# EAGLE board Yun_Shield.v2.4 (EAGLE 7.5.0)
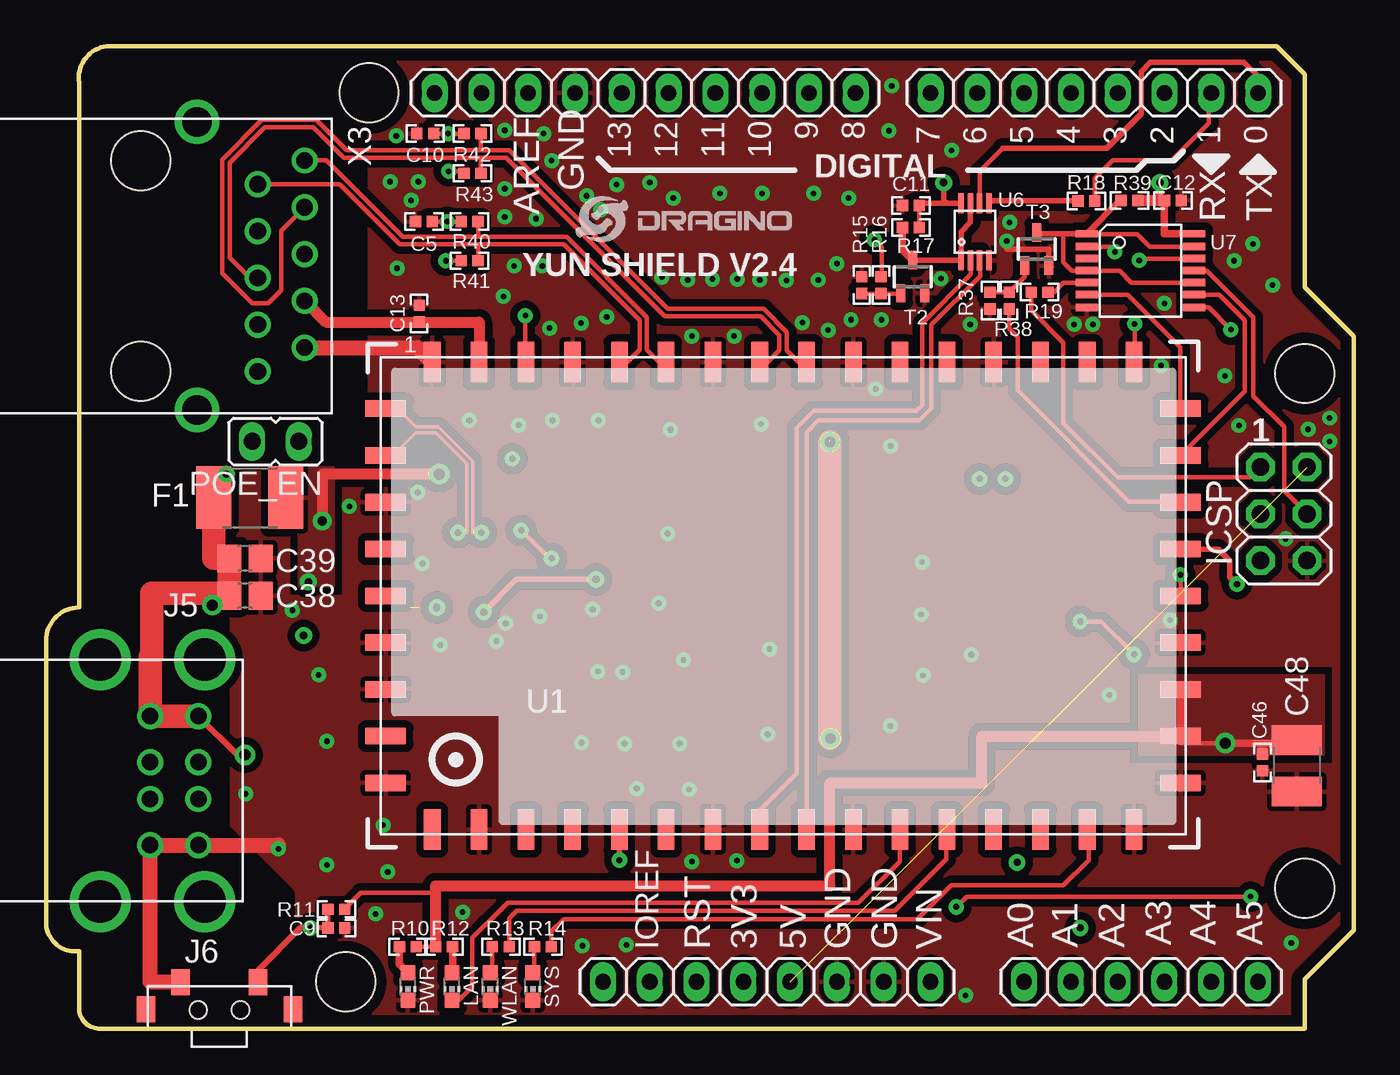
[diagram p0: board, top side]
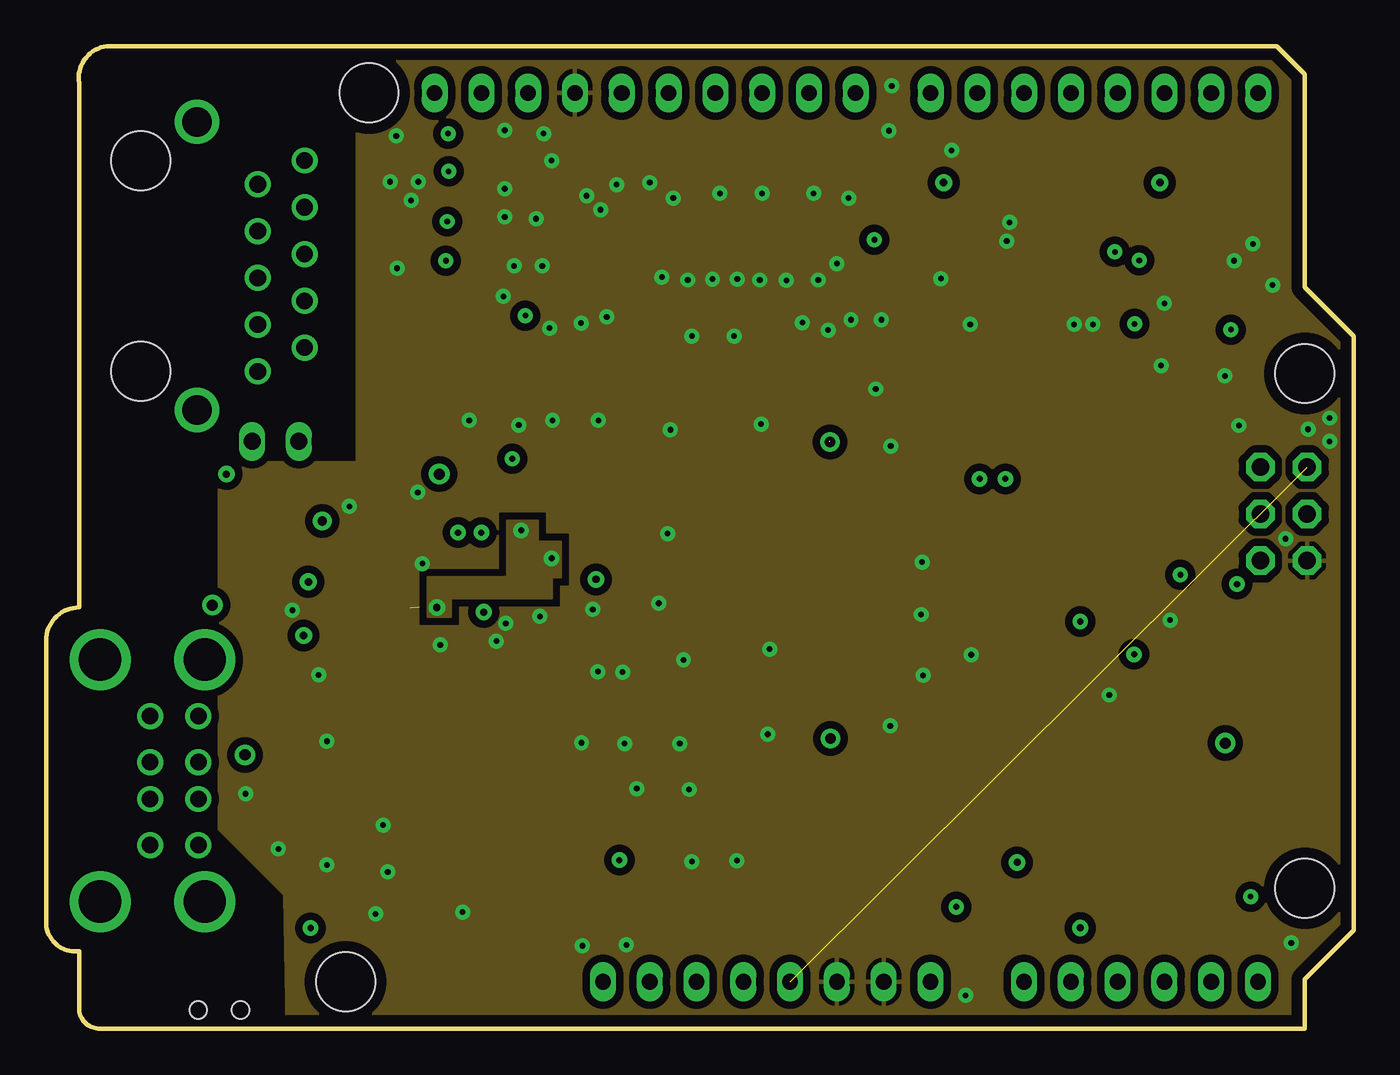
[diagram p1: board, inner layer GND]
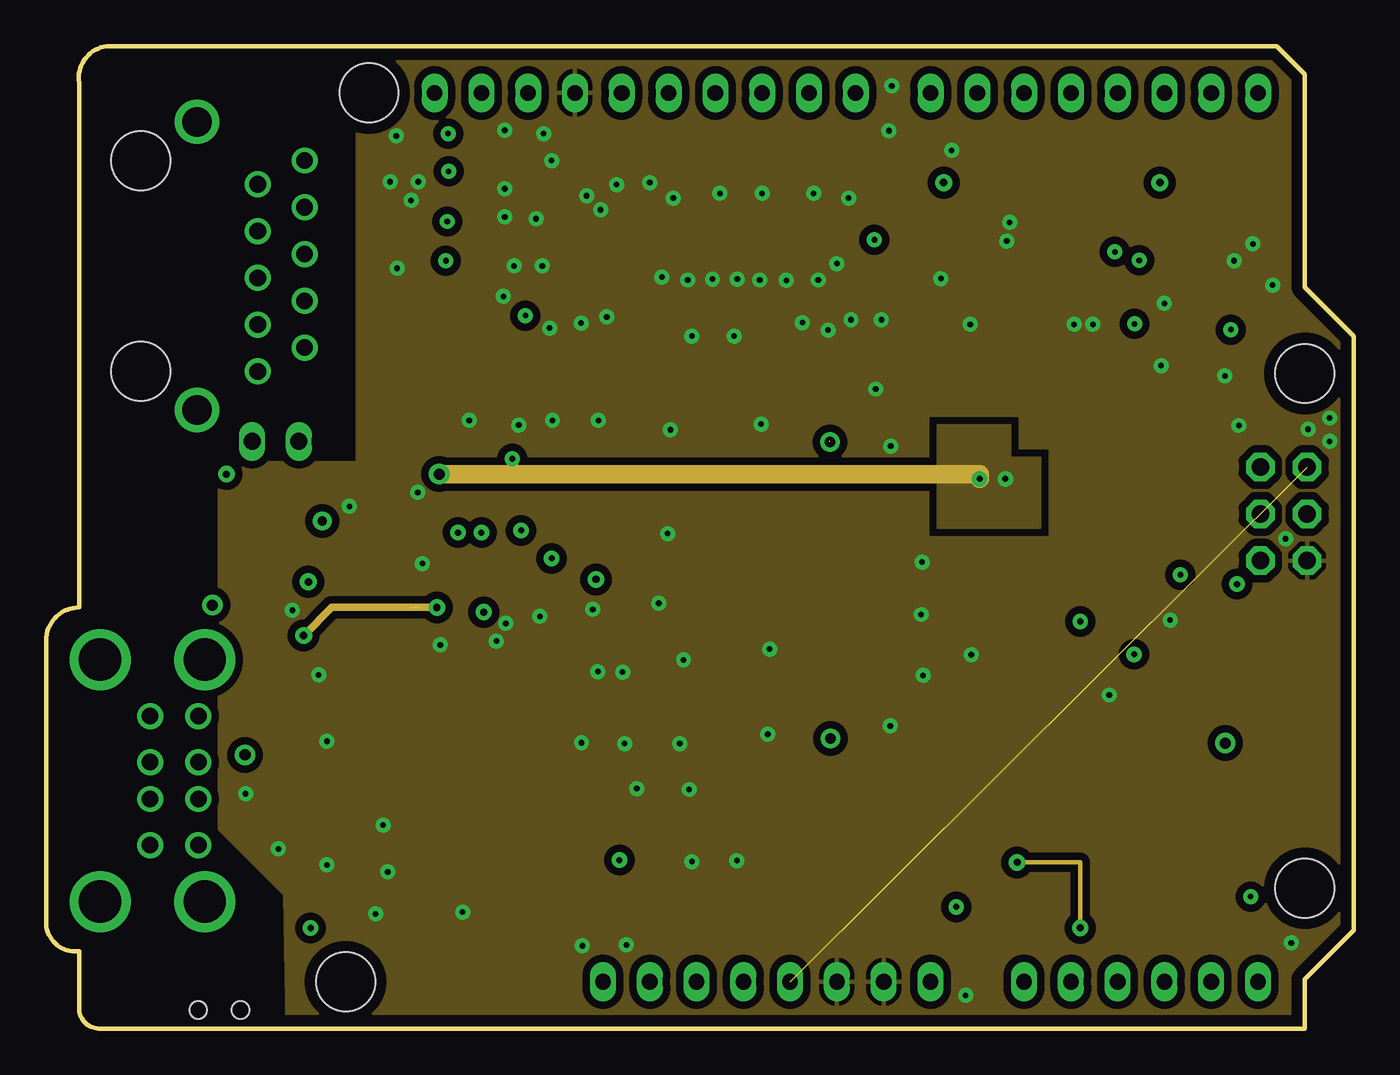
[diagram p2: board, inner layer VCC]
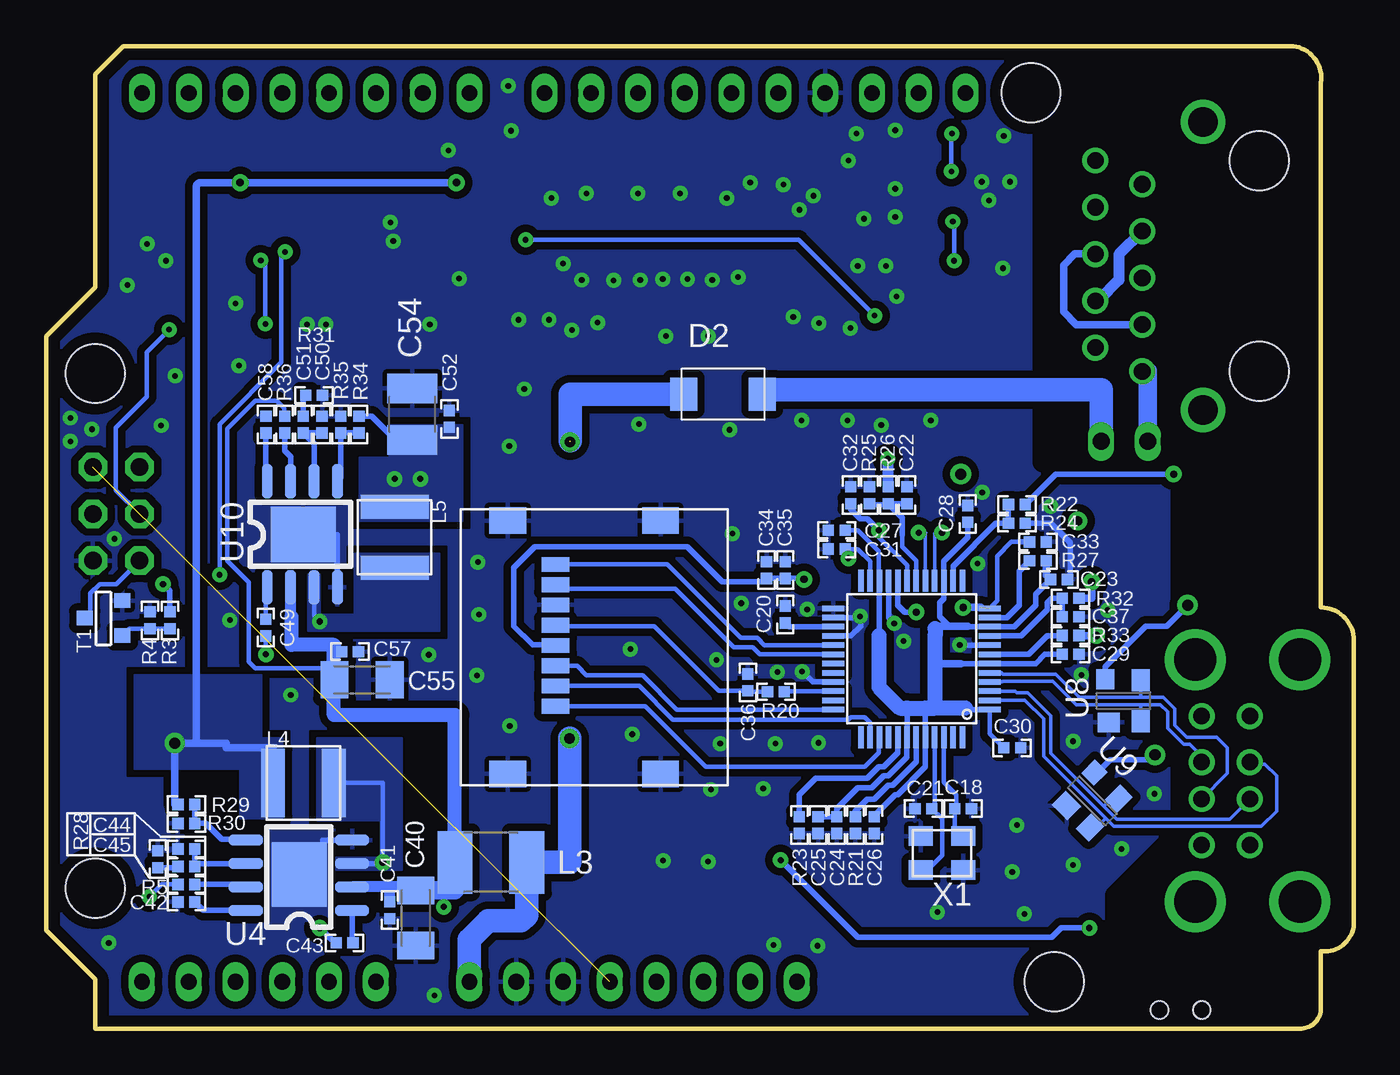
[diagram p3: board, bottom side, seen from below]

Size 71 x 53.35 mm. Coordinates in mm from the lower left corner, seen from the top.
Outline: 66.81,53.35 68.34,51.82 68.34,40.27 71,37.6 71,5.34 68.34,2.67 68.34,0.01 3.04,0.01 arc-90 1.79,1.02 1.79,4.2 1.41,4.2 arc-90 0.01,5.98 0.01,21.09 arc-90 1.79,22.87 1.79,51.35 arc-90 3.3,53.35 66.81,53.35
Copper layers (1*2+15*16): Top 0.035mm / dielectric 10mil / GND 0.017mm / dielectric 15mil / VCC 0.017mm / dielectric 10mil / Bottom 0.035mm
Design rules "default *": minimum track width 10mil, minimum drill 12mil, track to track 6mil, track to pad 8mil, pad to pad 8mil, via to via 12mil, smd to smd 8mil, copper to edge 24mil, drill to drill 12mil, minimum pad ring 10mil, minimum via ring 10mil, stop-mask expansion 2mil, vias tented up to drill 30mil, thermal gap 10mil
Net classes: 1 power: width 0.254 mm, drill 0.61 mm, clearance 0.254 mm; 2 gnd: width 0.305 mm, drill 0.33 mm, clearance 0.254 mm; 3 usbvcc: width 0.254 mm, drill 0.61 mm, clearance 0.254 mm; 4 aref: width 0.254 mm, drill 0.61 mm, clearance 0.254 mm; 5 usbtrace: width 0.254 mm, clearance 0.152 mm; 6 usbtrace-4layer: width 0.191 mm, clearance 0.203 mm
Holes 3.2 mm at 68.34,35.57 68.34,7.63 17.54,50.81 16.27,2.55
tRestrict: area 3.1,0.9 to 16.9,52.6
bRestrict: area 3.1,0.9 to 16.9,52.5
vRestrict: area 43.6,35.2 to 44.1,35.7

## Footprints (pad centres in the part's own frame; a part is rotated, then mirrored left to right if it is on the bottom)
C0402 = smd 0.61 x 0.61: 1 -0.457,0; 2 0.457,0
C0805 = smd 1.3 x 1.5: 1 -0.85,0; 2 0.85,0
C1206K = smd 1.5 x 2: 1 -1.5,0; 2 1.5,0
C1210 = smd 1.6 x 2.7: 1 -1.4,0; 2 1.4,0
DO214AC = smd 1.45 x 1.8: A 2.13,0; C -2.13,0
L1812 = smd 1.9 x 3.4: 1 -1.95,0; 2 1.95,0
2X03 = drill 0.95 pad 1.55 octagon: 1 -2.54,-1.27; 2 -2.54,1.27; 3 0,-1.27; 4 0,1.27; 5 2.54,-1.27; 6 2.54,1.27
1X08 = drill 0.85 pad 1.422 long: 1 -8.89,0; 2 -6.35,0; 3 -3.81,0; 4 -1.27,0; 5 1.27,0; 6 3.81,0; 7 6.35,0; 8 8.89,0
1X06 = drill 0.85 pad 1.422 long: 1 -6.35,0; 2 -3.81,0; 3 -1.27,0; 4 1.27,0; 5 3.81,0; 6 6.35,0
USB-DUAL-JS-AF10-002 = drill 0.9: 1 0,3.5; 2 0,1; 3 0,-1; 4 0,-3.5; 5 -2.62,3.5; 6 -2.62,1; 7 -2.62,-1; 8 -2.62,-3.5 | drill 2.3: 9 0.35,6.57; 10 0.35,-6.57; 11 -5.33,6.57; 12 -5.33,-6.57
TS-017 = smd 1 x 1.4: P$1 -2.1,-1.5; P$2 2.1,-1.5; P$3 -3.994,-0.034; P$4 3.994,-0.034 | hole 0.95: -1.15,0; 1.15,0
1X10 = drill 0.85 pad 1.422 long: 1 -11.43,0; 2 -8.89,0; 3 -6.35,0; 4 -3.81,0; 5 -1.27,0; 6 1.27,0; 7 3.81,0; 8 6.35,0; 9 8.89,0; 10 11.43,0
SWPA4020S = smd 3.7 x 1.3: P$1 0,1.65; P$2 0,-1.65
CHIP-LED0603 = smd 0.8 x 0.8: A 0,-0.75; C 0,0.75
JP1 = drill 0.914 long: 1 0,-1.27; 2 0,1.27
R0402 = smd 0.61 x 0.61: 1 -0.457,0; 2 0.457,0
SOT-23 = smd 0.787 x 0.889: 1 0,-1.016; 2 -0.95,1.016; 3 0.95,1.016
SOT323 = smd 0.5 x 1: 1 0,0.9; 2 -0.65,-0.9; 3 0.65,-0.9
HE50 = smd 0.9 x 2.198: 1 -19.05,12.69; 2 -16.51,12.69; 3 -13.97,12.69; 4 -11.43,12.69; 5 -8.89,12.69; 6 -6.35,12.69; 7 -3.81,12.69; 8 -1.27,12.69; 9 1.27,12.69; 10 3.81,12.69; 11 6.35,12.69; 12 8.89,12.69; 13 11.43,12.69; 14 13.97,12.69; 15 16.51,12.69; 16 19.05,12.69; 26 19.05,-12.69; 27 16.51,-12.69; 28 13.97,-12.69; 29 11.43,-12.69; 30 8.89,-12.69; 31 6.35,-12.69; 32 3.81,-12.69; 33 1.27,-12.69; 34 -1.27,-12.69; 35 -3.81,-12.69; 36 -6.35,-12.69; 37 -8.89,-12.69; 38 -11.43,-12.69; 39 -13.97,-12.69; 40 -16.51,-12.69; 41 -19.05,-12.69 | smd 2.198 x 0.9: 17 21.579,10.16; 18 21.579,7.62; 19 21.579,5.08; 20 21.579,2.54; 21 21.579,0; 22 21.579,-2.54; 23 21.579,-5.08; 24 21.579,-7.62; 25 21.579,-10.16; 42 -21.579,-10.16; 43 -21.579,-7.62; 44 -21.579,-5.08; 45 -21.579,-2.54; 46 -21.579,0; 47 -21.579,2.54; 48 -21.579,5.08; 49 -21.579,7.62; 50 -21.579,10.16
AU6350_LQFP-48 = smd 1.2 x 0.3: 1 -4.25,2.75; 2 -4.25,2.25; 3 -4.25,1.75; 4 -4.25,1.25; 5 -4.25,0.75; 6 -4.25,0.25; 7 -4.25,-0.25; 8 -4.25,-0.75; 9 -4.25,-1.25; 10 -4.25,-1.75; 11 -4.25,-2.25; 12 -4.25,-2.75; 25 4.25,-2.75; 26 4.25,-2.25; 27 4.25,-1.75; 28 4.25,-1.25; 29 4.25,-0.75; 30 4.25,-0.25; 31 4.25,0.25; 32 4.25,0.75; 33 4.25,1.25; 34 4.25,1.75; 35 4.25,2.25; 36 4.25,2.75 | smd 0.3 x 1.2: 13 -2.75,-4.25; 14 -2.25,-4.25; 15 -1.75,-4.25; 16 -1.25,-4.25; 17 -0.75,-4.25; 18 -0.25,-4.25; 19 0.25,-4.25; 20 0.75,-4.25; 21 1.25,-4.25; 22 1.75,-4.25; 23 2.25,-4.25; 24 2.75,-4.25; 37 2.75,4.25; 38 2.25,4.25; 39 1.75,4.25; 40 1.25,4.25; 41 0.75,4.25; 42 0.25,4.25; 43 -0.25,4.25; 44 -0.75,4.25; 45 -1.25,4.25; 46 -1.75,4.25; 47 -2.25,4.25; 48 -2.75,4.25
RT8250-SOP8 = smd 1.88 x 0.61: 1 -1.219,0; 2 -1.219,-1.27; 3 -1.219,-2.54; 4 -1.219,-3.81; 5 4.547,-3.81; 6 4.547,-2.54; 7 4.547,-1.27; 8 4.547,0 | smd 2.997 x 3.505: 9 1.651,-1.956
US8 = smd 0.3 x 1.1: 1 -0.75,-1.55; 2 -0.25,-1.55; 3 0.25,-1.55; 4 0.75,-1.55; 5 0.75,1.55; 6 0.25,1.55; 7 -0.25,1.55; 8 -0.75,1.55
74VHC125 = smd 0.4 x 1.2: 1 -2.13,-2.88; 2 -1.43,-2.88; 3 -0.78,-2.88; 4 -0.13,-2.88; 5 0.52,-2.88; 6 1.17,-2.88; 7 1.87,-2.88; 8 1.87,2.97; 9 1.17,2.97; 10 0.52,2.97; 11 -0.13,2.97; 12 -0.78,2.97; 13 -1.43,2.97; 14 -2.13,2.97
SOT143 = smd 1.194 x 1.067: 1 -0.72,-1.207 | smd 0.991 x 1.194: 2 1.007,-1.143; 3 1.007,1.067 | smd 0.991 x 1.067: 4 -0.923,1.13
RIONET_472192001_SD = smd 0.8 x 1.5: 1 3.2,-1.55; 2 2.1,-1.55; 3 1,-1.55; 4 -0.1,-1.55; 5 -1.2,-1.55; 6 -2.3,-1.55; 7 -3.4,-1.55; 8 -4.5,-1.55 | smd 1.45 x 2: G1 6.875,-4.15; G2 6.875,4.15; G3 -6.875,4.15; G4 -6.875,-4.15
SMARTPRJ_CRYSTAL-3.2-2.5 = smd 1.3 x 1.05: 1 -1.15,-0.925; 2 1.15,-0.925; 3 1.15,0.925; 4 -1.15,0.925
MJ1A-B211-RT009 = drill 0.9: 1 -5.725,9.07; 2 -4.435,6.53; 3 -3.185,9.07; 4 -1.895,6.53; 5 -0.645,9.07; 6 0.645,6.53; 7 1.895,9.07; 8 3.185,6.53; 9 4.435,9.07; 10 5.725,6.53 | drill 1.6: M1 -7.825,3.23; M2 7.825,3.23 | hole 3.2: -5.715,0.18; 5.715,0.18

## Placement (x,y rotation side)
C5  0.1u 10v  [C0402]  20.51,43.82 180 top
C9  0.1u NL  [C0402]  15.76,5.47 0 top
C10  0.1u 10v  [C0402]  20.58,48.6 180 top
C11  0.1uF  [C0402]  46.95,44.68 0 top
C12  0.1uF  [C0402]  61.17,44.96 180 top
C13  0.1u 10v  [C0402]  20.25,38.82 90 top
C18  18pF  [C0402]  21.22,11.94 0 bottom
C20  1uF  [C0402]  30.87,22.49 90 bottom
C21  18pF  [C0402]  23.38,11.94 180 bottom
C22  1uF  [C0402]  24.27,28.96 90 bottom
C23  4.7uF  [C0402]  16.01,24.39 0 bottom
C24  4.7uF  [C0402]  28.08,11.06 270 bottom
C25  1uF  [C0402]  29.09,11.06 270 bottom
C26  4.7uF  [C0402]  26.05,11.06 270 bottom
C27  0.1uF  [C0402]  28.08,27.06 180 bottom
C28  0.1uF  [C0402]  20.97,27.95 90 bottom
C29  0.1uF  [C0402]  15.38,20.33 0 bottom
C30  0.1uF  [C0402]  18.55,15.25 0 bottom
C31  4.7uF  [C0402]  28.08,26.04 180 bottom
C32  4.7uF  [C0402]  27.32,28.96 90 bottom
C33  0.1uF  [C0402]  17.16,26.42 0 bottom
C34  0.1uF  [C0402]  31.89,24.9 90 bottom
C35  1uF  [C0402]  30.87,24.9 90 bottom
C36  10pf,NL  [C0402]  32.9,18.8 90 bottom
C37  2.2uF  [C0402]  15.38,22.36 0 bottom
C38  10uF  [C0805]  10.81,23.5 180 top
C39  10uF  [C0805]  10.81,25.53 180 top
C40  10u,25v  [C1206K]  50.94,6.01 270 bottom
C41  NL  [C0402]  52.34,6.43 270 bottom
C42  0.1u,10v  [C0402]  63.38,6.88 180 bottom
C43  0.01u,16v  [C0402]  54.8,4.66 180 bottom
C44  NL  [C0402]  63.38,9.76 0 bottom
C45  3900pf,25v  [C0402]  63.38,8.8 0 bottom
C46  NL  [C0402]  66.03,14.46 90 top
C48  22u,10v  [C1210]  67.9,14.27 270 top
C49  0.01u,16v  [C0402]  59.07,21.77 270 bottom
C50  NL  [C0402]  56.02,32.8 270 bottom
C51  3900pf,25v  [C0402]  57.03,32.8 270 bottom
C52  NL  [C0402]  49.11,33.1 270 bottom
C54  22u,10v  [C1210]  51.12,33.37 90 bottom
C55  10uf,25v  [C1206K]  53.84,18.94 0 bottom
C57  NL  [C0402]  54.5,20.47 0 bottom
C58  0.1u,10v  [C0402]  59.07,32.8 90 bottom
D2  STPS1L30  [DO214AC]  34.25,34.45 0 bottom
F1  Fuse , 1A  [L1812]  11.06,28.84 0 top
ICSP  ICSP  [2X03]  67.19,27.95 270 top
J2  8x1F-H8.5  [1X08]  56.91,50.81 180 top
J3  8x1F-H8.5  [1X08]  39.13,2.55 0 top
J4  6x1F-H8.5  [1X06]  59.45,2.55 0 top
J5  USB-CON-A-DUAL  [USB-DUAL-JS-AF10-002]  8.27,13.47 0 top
J6  SWITCHTS-017  [TS-017]  9.41,1.02 180 top
JP1  10x1F-H8.5  [1X10]  32.52,50.81 180 top
L3  1A  [L1812]  46.85,9.03 180 bottom
L4  10uH /SWPA4020S100MT  [SWPA4020S]  57.03,13.34 270 bottom
L5  15uH / SWPA4030S150MT  [SWPA4020S]  52.08,26.68 180 bottom
LAN  Yellow  [CHIP-LED0603]  22.03,2.29 180 top
POE_EN  [JP1]  12.46,31.88 90 top
PWR  Yellow-Green  [CHIP-LED0603]  19.65,2.29 180 top
R3  10k  [R0402]  64.28,22.17 90 bottom
R4  10k  [R0402]  65.36,22.17 90 bottom
R5  100K  [R0402]  63.38,7.83 180 bottom
R10  330R  [R0402]  19.64,4.45 180 top
R11  10K  [R0402]  15.76,6.48 0 top
R12  330R  [R0402]  21.61,4.45 0 top
R13  270R  [R0402]  24.69,4.45 180 top
R14  270R  [R0402]  26.97,4.45 180 top
R15  47K  [R0402]  44.28,40.37 270 top
R16  47K  [R0402]  45.32,40.37 270 top
R17  100K  [R0402]  46.95,43.49 180 top
R18  3.3K  [R0402]  56.48,44.94 0 top
R19  3.3K  [R0402]  53.94,39.99 180 top
R20  0R  [R0402]  31.38,18.29 180 bottom
R21  680  [R0402]  27.06,11.06 90 bottom
R22  5.1K  [R0402]  18.3,28.45 0 bottom
R23  330  [R0402]  30.11,11.06 270 bottom
R24  10K  [R0402]  18.3,27.44 180 bottom
R25  470K  [R0402]  26.3,28.96 90 bottom
R26  47K  [R0402]  25.28,28.96 90 bottom
R27  0R  [R0402]  17.16,25.41 180 bottom
R28  6.81K  [R0402]  64.94,9.2 270 bottom
R29  26.1K  [R0402]  63.38,12.17 180 bottom
R30  10K  [R0402]  63.38,11.14 0 bottom
R31  13K  [R0402]  56.45,34.39 180 bottom
R32  0R  [R0402]  15.38,23.37 180 bottom
R33  0R  [R0402]  15.38,21.34 180 bottom
R34  45.3K  [R0402]  54.02,32.8 90 bottom
R35  10K  [R0402]  55.01,32.8 270 bottom
R36  100K  [R0402]  58.05,32.8 90 bottom
R37  47K  [R0402]  51.24,39.53 90 top
R38  47K  [R0402]  52.28,39.53 90 top
R39  100K  [R0402]  58.81,44.96 180 top
R40  49.9R  [R0402]  23,43.82 0 top
R41  49.9R  [R0402]  23,41.69 0 top
R42  49.9R  [R0402]  23.15,48.6 0 top
R43  49.9R  [R0402]  23.15,46.44 0 top
SYS  WHITE  [CHIP-LED0603]  26.43,2.29 180 top
T1  BSS138/SOT23  [SOT-23]  67.88,22.29 270 bottom
T2  2SC4081/SC70  [SOT323]  47.05,40.82 0 top
T3  2SC4081/SC70  [SOT323]  53.78,42.32 0 top
U1  HE  [HE50]  40.02,23.5 0 top
U3  AU6353  [AU6350_LQFP-48]  24.01,20.07 180 bottom
U4  RT8250  [RT8250-SOP8]  55.61,6.43 180 bottom
U6  NC7WZ125  [US8]  50.43,43.26 0 top
U7  74VHC125  [74VHC125]  59.37,41.03 270 top
U8  YSSR05  [SOT143]  12.58,17.84 0 bottom
U9  YSSR05  [SOT143]  14.23,12.45 315 bottom
U10  RT8250  [RT8250-SOP8]  59,25.18 90 bottom
U$1  LOGO-NEW  [LOGO-SILK-NEW]  28.76,42.73 0 top
U$14  [RIONET_472192001_SD]  41.79,20.71 270 bottom
WLAN  BLUE  [CHIP-LED0603]  24.12,2.29 180 top
X1  12Mhz  [SMARTPRJ_CRYSTAL-3.2-2.5]  22.36,9.53 180 bottom
X3  RJ45-MJ1A-B211-RT009  [MJ1A-B211-RT009]  4.96,41.41 270 top

## Library data of the parts
C5 C9-C13 C18 C20-C46 C48-C52 C54 C55 C57 C58 D2 F1 J5 J6 L3-L5 LAN POE_EN PWR R3-R5 R10-R43 SYS U1 U3 U4 U6-U10 U$1 U$14 WLAN = dragino
ICSP J2-J4 JP1 = SmartPrj
T1 = dragino; OC_FARNELL: unknown; OC_NEWARK: unknown
T2 T3 = zetex; MPN: DSS4160U-7; OC_FARNELL: 1710696; OC_NEWARK: 25R4558
X1 = rionita7
X3 = dragino-passive

## Nets
2.5V: U1.36
+3V3: C11.2 C12.2 C46.2 C48.1 L4.P$2 R10.1 R11.2 R12.1 R17.1 R29.2 R39.1 U1.23 U1.24 U6.8 U7.14
+5V [usbvcc]: ICSP.2 J3.5
+5V_USB [usbvcc]: C52.2 C54.1 F1.2 L5.P$2 R26.2 R32.1 R34.2
/RESET: ICSP.5 T1.1
/SPI_OE: R39.2 T3.1 U7.1 U7.4 U7.10 U7.13
/UART_OE: R17.2 T2.1 U6.1 U6.7
CHIP_RESETN: C22.1 R25.1 R26.1 U3.18
CPWR_V33: C34.1 C35.1 U3.20 U$14.4
CTRL_2.0V: C13.1 U1.2 X3.4 X3.7
DP1_OVRCUR: R22.1 R24.2 U3.14
DP1_PWRUP: U3.13
GND [gnd]: C5.2 C9.2 C10.2 C11.1 C12.1 C13.2 C18.2 C20.2 C21.2 C22.2 C23.2 C24.2 C25.2 C26.2 C27.2 C28.2 C29.2 C30.2 C31.2 C32.2 C33.2 C34.2 C35.2 C36.2 C37.2 C38.1 C39.1 C40.2 C41.2 C42.2 C44.1 C46.1 C48.2 C50.1 C52.1 C54.2 C55.2 C57.2 C58.2 ICSP.6 J3.6 J3.7 J5.4 J5.8 J6.P$2 JP1.7 PWR.C R4.2 R15.1 R21.1 R23.2 R24.1 R25.2 R28.1 R30.1 R31.1 R35.1 R37.1 SYS.C T1.2 T2.3 T3.3 U1.1 U1.4 U1.7 U1.10 U1.13 U1.22 U1.25 U1.26 U1.32 U1.35 U1.40 U1.42 U1.44 U1.45 U1.48 U3.8 U3.21 U3.25 U3.26 U3.28 U3.33 U4.4 U4.9 U6.4 U7.7 U8.1 U9.1 U10.4 U10.9 U$14.6 U$14.G1 U$14.G2 U$14.G3 U$14.G4 WLAN.C X1.2 X1.4 X3.9
GPIO18: U1.18 U7.9
GPIO19: R38.1 U1.19
GPIO20: R3.2 U1.20
GPIO21: U1.16 U7.12
GPIO22: U1.17 U7.6
GPIO23: U1.21 U7.2
GPIO24: R16.1 U1.3
GPIO28: R14.1 U1.27
JUMPSTART: C9.1 J6.P$1 R11.1 U1.37
LED_P0: LAN.C U1.31
LED_WLAN: R13.1 U1.30
MISO: ICSP.1 R19.2
MOSI: ICSP.4 U7.11
N$1: R3.1 R4.1 T1.3
N$2: R15.2 R16.2 T2.2
N$4: PWR.A R10.2
N$6: LAN.A R12.2
N$8: R13.2 WLAN.A
N$9: R14.2 SYS.A
N$10: R18.1 U6.5
N$11: R5.1 U4.7
N$12: R23.1 U3.41
N$13: R37.2 R38.2 T3.2
N$14: R19.1 U7.5
N$15: X3.5 X3.8
N$16: R21.2 U3.43
N$17: C5.1 R40.1 R41.1
N$18: C10.1 R42.1 R43.1
N$19: C42.1 U4.8
N$20: POE_EN.2 X3.10
N$22: C36.1 R20.2 U$14.5
N$23: C20.1 U3.27
N$24: R27.2 U3.11
N$25: C43.1 U4.1
N$26: C43.2 L4.P$1 U4.3
N$27: C44.2 C45.2 U4.6
N$28: C45.1 R28.2
N$29: C37.1 R32.2 U3.9
N$30: R33.2 U3.7
N$31: R29.1 R30.2 U4.5
N$32: C49.1 U10.1
N$33: C49.2 L5.P$1 U10.3
N$34: C50.2 C51.2 U10.6
N$35: C51.1 R31.2
N$36: R34.1 R35.2 U10.5
N$37: R36.1 U10.7
N$38: C58.1 U10.8
N$101: C40.1 C41.1 C55.1 C57.1 L3.2 R5.2 R36.2 U4.2 U10.2
OPTIONAL_ANT: U1.41
P0_RX_N: R43.2 U1.8 X3.6
P0_RX_P: R42.2 U1.9 X3.3
P0_TX_N: R41.2 U1.5 X3.2
P0_TX_P: R40.2 U1.6 X3.1
P1_P2_PWR: C38.2 C39.2 F1.1 J5.1 J5.5 R22.2 U8.4 U9.4
POE_VIN: D2.A POE_EN.1
RX: J2.2 R18.2
SCK: ICSP.3 U7.8
SD_CLK: R20.1 U3.34
SD_CMD: U3.36 U$14.3
SD_DAT0: U3.30 U$14.7
SD_DAT1: U3.29 U$14.8
SD_DAT2: U3.39 U$14.1
SD_DAT3: U3.38 U$14.2
SS: U7.3
TX: J2.1 U6.6
UART_RX: U1.33 U6.3
UART_TX: U1.34 U6.2
USB3_D_N [usbtrace-4layer]: J5.6 U3.2 U9.2
USB3_D_P [usbtrace-4layer]: J5.7 U3.3 U9.3
USB4_D_N [usbtrace-4layer]: J5.2 U3.4 U8.2
USB4_D_P [usbtrace-4layer]: J5.3 U3.5 U8.3
USB_N [usbtrace]: U1.50 U3.17
USB_P [usbtrace]: U1.49 U3.16
VCC1.8: C31.1 C32.1 C33.1 R33.1 U3.12 U3.19 U3.23
VCC3.3: C23.1 C24.1 C25.1 C26.1 C27.1 C28.1 C29.1 C30.1 R27.1 U3.1 U3.6 U3.10 U3.15 U3.22 U3.42 U3.44
VIN: D2.C J3.8 L3.1
XSCI: C18.1 U3.46 X1.1
XSCO: C21.1 U3.45 X1.3

## Tracks (layer width: path | path; a pad name or v marks a point on that pad's centre or on a via)
+3V3  (via drill 0.41, 0.6)
  Top 0.254: R12.1 R10.1 | C11.2 R17.1 | U1.24 61.59,15.5 v64.02,15.5 | R11.2 16.22,6.51 17.08,7.37 21.1,7.37 21.15,7.42
  Top 0.305: C11.2 47.46,44.74 arc-45 47.64,44.81 U6.8 48.98,44.81 arc-90 48.73,45.07 v48.73,45.93
  Top 0.406: C46.2 66.03,15.5 | 66.03,15.5 v64.02,15.5 | C48.1 67.9,15.5 66.03,15.5 | U1.23 U1.24 | v60.46,45.93 60.46,45.22 arc90 C12.2 60.72,43.16 U7.14
  Top 0.61: R39.1 C12.2 | R12.1 21.15,7.42 21.15,7.75 42.56,7.75 42.56,13.34 50.81,13.34 50.81,15.88 U1.24
  Bottom 0.406: R29.2 64.02,12.17 v64.02,15.5 62.85,15.5 | L4.P$2 58.68,15.25 61.22,15.25 61.22,15.5 62.85,15.5 | v48.73,45.93 v60.46,45.93 62.6,45.93 arc-90 62.85,45.68 62.85,15.5
  pour Bottom (no thermals): 58.18,15.75 58.18,11.44 60.46,11.44 60.46,14.1 66.18,14.1 66.18,19.18 59.32,19.18 59.32,15.75
  pour Top (no thermals): 59.32,19.18 69.35,19.18 69.35,14.87 59.32,14.87
+5V  (1 unrouted)
+5V_USB  (via drill 0.3, 0.33, 0.41, 0.51, 0.61)
  Top 0.61: v21.35,30.11 15,30.11 v15,27.57
  VCC 0.61: v25.31,30.94 25.31,30.41 25,30.11
  VCC 1.016: v21.35,30.11 25,30.11 50.68,30.11 v50.68,29.85
  Bottom 0.305: R34.2 53.33,33.26 52.08,32.01 51.17,32.01 C54.1
  Bottom 0.406: R32.1 14.23,23.37 v14.23,24.26
  Bottom 0.61: R26.2 25.28,30.92 v25.31,30.94
  other vias: 52.08,29.85
  pour Bottom (no thermals): 48.4,32.77 48.4,27.57 53.99,27.57 53.99,30.99 52.33,30.99 52.33,32.77
  pour VCC (no thermals): 48.4,31.76 48.4,27.18 53.99,27.18 53.99,30.99 52.33,30.99 52.33,32.77 48.4,32.77
  pour Top: 13.85,30.49 15.63,30.49 15.63,24.01 13.73,24.01 13.73,30.49
/RESET
  Bottom 0.254: T1.1 68.59,22.6 68.59,23.63 68.08,24.14 67.19,24.14 ICSP.5
/SPI_OE
  Top 0.254: 56.01,43.14 55.99,43.16 | U7.10 58.93,40.51 58.28,41.15 U7.4 | U7.4 | U7.4 55.69,41.15 55.23,41.61 55.23,43.16 | U7.13 59.92,42.46 59.24,43.14 56.51,43.14 U7.1
  Top 0.305: R39.2 58.3,44.96 U7.1 55.99,43.16 55.23,43.16 53.85,43.16 T3.1
/UART_OE
  Top 0.305: T2.1 U6.1 49.68,43.27 50.18,43.77 U6.7
  Top 0.406: R17.2 46.49,42.28 T2.1
CHIP_RESETN
  Bottom 0.254: 24.52,26.8 24.52,26.17 23.76,25.41 U3.18
  Bottom 0.305: 24.52,26.8 24.52,27.74 R26.1 | R26.1 25.28,28.45 26.25,28.45 R25.1 | R26.1 C22.1
CPWR_V33  (via drill 0.38)
  Top 0.305: v23.76,22.61 25.54,24.39 v29.86,24.39
  Bottom 0.305: U3.20 24.78,24.31 24.78,22.99 24.39,22.61 v23.76,22.61 | U$14.4 43.37,20.83 44.59,20.83 45.6,21.85 45.6,25.03 44.46,26.17 36.21,26.17 34.3,24.26 32.07,24.26 C34.1 C35.1 29.91,24.44 v29.86,24.39
CTRL_2.0V
  Top 0.305: 23.51,36.05 U1.2
  Top 0.61: X3.7 15.19,38.36 C13.1 23.51,38.36 U1.2
  Bottom 0.61: X3.4 12.76,42.04 12.76,40.65 13.89,39.51 X3.7
DP1_OVRCUR
  Bottom 0.305: U3.14 21.76,25.12 19.44,27.44 R24.2 R22.1
GND  (via drill 0.3)
  Top 0.305: T3.3 54.43,42.32 52.16,42.32 v52.16,42.75
  Top 0.813: X3.9 20.18,36.97 U1.1 | J6.P$2 5.65,2.52 J5.8 J5.4 12.61,9.97 v12.61,9.76
  Bottom 0.305: U4.9 57.26,9.96 55.99,9.96 55.99,10.24 U4.4 | U10.9 55.19,26.83 U10.4 | R24.1 16.47,27.44 15.4,26.37 15.4,24.54 C23.2 | U3.21 25.26,22.31 v24.95,22 | U3.26 26.87,22.32 v26.81,22.38 26.78,22.36 26.78,21.85 27.31,21.32 U3.28 | U3.33 29.39,18.82 v29.96,19.39 | U3.8 21.4,20.82 v21.4,20.83
  other vias: 15.25,8.9 18.3,11.06 18.55,8.52 37.35,37.6 35.06,37.6 41.06,38.33 30.97,45.83 40.19,40.62 38.75,40.65 37.53,40.7 36.18,40.7 34.83,40.65 33.44,40.8 24.83,39.76 29.04,38.31 27.34,38.03 30.44,38.64 26.93,41.41 25.41,41.41 24.9,44.08 26.6,43.97 24.9,45.6 24.9,48.77 27.44,47.12 27.01,48.6 29.35,45.22 30.11,44.46 32.78,45.93 19.06,41.28 20.2,45.98 18.68,45.98 19.82,44.96 19.01,48.47 34.05,45.09 36.59,45.35 38.87,45.35 41.67,45.35 43.57,45.09 42.94,41.54 41.92,40.65 42.45,37.93 43.7,38.49 45.35,38.49 48.58,40.72 49.16,47.68 45.76,48.75 45.91,51.19 52.31,43.77 55.81,38.23 56.83,38.23 65.52,42.6 66.58,40.37 64.5,41.69 69.68,33.15 68.51,32.54 69.68,31.88 67.3,26.6 22.97,33.03 27.49,33.03 29.98,33.03 25.66,32.77 33.89,32.52 38.82,32.82 33.74,26.88 10.83,12.76 15.25,15.6 17.89,6.23 22.62,6.33 29.12,4.5 31.51,4.55 37.5,9.12 34.91,12.99 29.07,15.53 31.41,15.47 34.4,15.47 39.18,15.98 39.28,20.61 47.56,25.33 47.51,22.49 47.61,19.18 45.83,16.44 57.72,18.12 61.02,22.18 60.54,36 63.99,35.44 64.76,32.75 49.92,1.81 67.6,4.65 50.23,20.3 45.86,31.63 45.05,34.73 29.68,22.76 24.45,21.04 34.61,20.02 31.3,19.36 20.18,29.11 20.43,25.25 33.26,23.09 35.06,9.07 32.07,13.04 16.47,28.35 13.37,22.71 14.79,19.21 50.18,38.23 60.72,39.38
  pour Bottom (isolate 0.406, rank 2): 88.66,52.71 88.66,0.64 3.93,0.64 arc-90 2.93,1.64 2.93,52.58 40.02,52.58
  pour Top (isolate 0.406, rank 2): 88.66,52.58 88.66,0.88 arc-90 72.54,0.39 4.06,0.39 arc-90 2.93,1.64 2.93,52.58
  pour VCC (isolate 0.406, rank 2): 71,53.35 71,0.01 13.09,0.01 12.96,7.25 9.41,10.8 9.41,30.74 16.9,30.74 16.9,53.35
  pour GND (isolate 0.406, rank 2): 71,53.35 71,0.01 13.09,0.01 12.96,7.25 9.41,10.8 9.41,30.74 16.9,30.74 16.9,53.35
  pour Bottom (no thermals): 58.94,10.55 58.94,5.85 55.64,5.85 55.64,10.55
  pour Bottom (no thermals): 60.46,28.33 60.46,25.15 54.75,25.15 54.75,28.33
GPIO18
  Top 0.254: U7.9 63.69,39.86 65.09,38.46 65.09,34.61 U1.18
GPIO19
  Top 0.254: R38.1 52.28,38 52.74,37.55 52.74,34.65 58.79,28.61 61.57,28.61 U1.19
GPIO20  (via drill 0.33)
  Top 0.305: U1.20 63.64,26.04 64.27,25.41 64.27,24.52 v64.65,24.14
  Bottom 0.305: v64.65,24.14 64.28,23.76 R3.2
GPIO21  (via drill 0.3)
  Top 0.254: 59.33,36.45 U1.16 59.09,36.22 v59.09,38.26 | U7.12 59.44,41.81 v59.34,41.71
  Bottom 0.254: v59.34,41.71 59.09,41.46 v59.09,38.26
GPIO22
  Top 0.254: U7.6 58.71,39.86 61.58,36.99 61.58,33.68 U1.17
GPIO23  (via drill 0.3)
  Top 0.254: v61.58,24.64 61.59,24.63 U1.21 | v58.02,42.17 57.74,42.46 U7.2
  Bottom 0.254: v61.58,24.64 61.58,32.82 58.23,36.18 58.23,41.97 v58.02,42.17
GPIO24  (via drill 0.3)
  Top 0.254: R16.1 45.37,40.88 45.37,42.42 v44.97,42.83 | v26.02,38.72 26.02,36.22 U1.3
  Bottom 0.254: v44.97,42.83 30.13,42.83 v26.02,38.72
GPIO28
  Top 0.254: 27.44,4.44 R14.1 27.43,5.28 28.1,5.95 47.31,5.95 49.13,7.78 55.23,7.78 56.6,9.15 56.6,10.74 U1.27
JUMPSTART  (via drill 0.33)
  Top 0.305: 31.13,10.95 U1.37 v31.13,9.15 | v14.36,5.47 C9.1 | C9.1 13.79,5.47 11.51,3.18 J6.P$1 | R11.1 C9.1
  Bottom 0.305: v31.13,9.15 26.93,4.96 16.39,4.96 15.89,5.47 v14.36,5.47
LED_P0
  Top 0.254: LAN.C 22.4,1.54 23.12,2.27 23.12,4.93 23.89,5.7 23.91,5.7 25.05,6.84 44.1,6.84 46.34,9.07 46.34,10.79 U1.31
LED_WLAN
  Top 0.254: 25.16,4.44 R13.1 25.14,5.99 25.56,6.41 46.09,6.41 48.88,9.2 48.88,10.79 U1.30
MISO
  Top 0.254: R19.2 53.48,39 55.23,37.24 55.23,32.87 58.18,29.93 65.36,29.93 ICSP.1
MOSI
  Top 0.254: ICSP.4 67.22,29.19 67.22,32.67 65.54,34.35 65.54,38.61 63,41.16 U7.11
N$1
  Bottom 0.254: T1.3 66.5,21.71 R4.1 R3.1
N$2
  Top 0.254: T2.2 46.39,39.91 R16.2 R15.2
N$4
  Top 0.406: R10.2 19.19,3.5 PWR.A
N$6
  Top 0.406: R12.2 22.07,3.08 LAN.A
N$8
  Top 0.254: R13.2 24.23,3.05
  Top 0.406: 24.23,3.05 WLAN.A
N$9
  Top 0.254: R14.2 26.52,3.13 SYS.A
N$10
  Top 0.305: R18.1 51.31,44.94 U6.5
N$11
  Bottom 0.305: U4.7 60.29,7.83 R5.1
N$12
  Bottom 0.305: U3.41 24.78,15.81 24.78,14.99 25.54,14.23 25.79,14.23 26.43,13.6 29.22,13.6 30.11,12.71 R23.1
N$13
  Top 0.254: T3.2 53.13,40.83 R38.2 R37.2
N$14
  Top 0.254: R19.1 54.72,39.99 55.23,40.49 56.48,40.49 U7.5
N$15
  Bottom 0.406: X3.8 15.06,38.22 15.76,38.92 15.76,41.46 15.15,42.07 14.05,42.07 X3.5
N$16
  Bottom 0.305: U3.43 23.76,14.48 25.03,13.21 25.28,13.21 26.05,12.45 26.43,12.45 27.06,11.82 R21.2
N$17  (via drill 0.3)
  Top 0.254: R40.1 v21.78,43.82 C5.1 | v21.7,41.69 R41.1
  Bottom 0.254: v21.78,43.82 21.7,43.82 v21.7,41.69
N$18  (via drill 0.3)
  Top 0.254: R42.1 v21.83,48.6 C10.1 | v21.85,46.54 22.69,46.54 R43.1
  Bottom 0.254: v21.83,48.6 21.85,48.6 v21.85,46.54
N$19
  Bottom 0.305: C42.1 62.47,6.43 U4.8
N$20
  Bottom 1.016: X3.10 11.19,35.68 POE_EN.2
N$22
  Bottom 0.254: R20.2 32.85,18.29 C36.1 34.48,18.35 37.98,21.85 43.29,21.85 U$14.5
N$23
  Bottom 0.305: U3.27 30.67,21.82 C20.1
N$24
  Bottom 0.305: U3.11 18.84,22.32 18.17,22.99 18.17,24.85 R27.2
N$25
  Bottom 0.305: U4.1 54.39,4.71 C43.1
N$26  (via drill 0.38)
  VCC 0.254: v52.72,9.02 56.14,9.02 v56.14,5.47
  Bottom 0.254: L4.P$1 52.72,13.34 v52.72,9.02
  Bottom 0.305: 55.3,4.71 C43.2 55.34,4.66 v56.14,5.47 | U4.3 52.77,8.97 v52.72,9.02
  pour Bottom (no thermals): 55.26,9.28 55.26,8.64 51.7,8.64 51.7,15.75 56.27,15.75 56.27,11.31 52.84,11.31 52.84,9.28
N$27
  Bottom 0.305: U4.6 62.76,8.97 C45.2 C44.2
N$28
  Bottom 0.305: C45.1 63.9,8.74 R28.2
N$29
  Bottom 0.305: U3.9 18.06,21.32 16.65,22.74 16.65,23.12 16.39,23.37 R32.2 C37.1
N$30
  Bottom 0.305: 15.96,21.47 R33.2 16.65,21.34 17.67,20.32 U3.7
N$31
  Bottom 0.305: R29.1 | R29.1 R30.2 62.33,11.14 61.48,10.29 60.21,10.29 U4.5
N$32
  Bottom 0.254: U10.1 59.07,23.88 C49.1
N$33  (via drill 0.33)
  Top 0.254: v59.07,20.33 57.29,22.1 v56.14,22.1
  Bottom 0.254: C49.2 59.07,21.31 v59.07,20.33 | v56.14,22.1 56.46,22.42 U10.3
  pour Bottom (no thermals): 49.67,25.79 54.24,25.79 54.24,22.49 56.14,22.49 56.14,24.64 56.78,24.64 56.78,21.6 49.67,21.6
N$34
  Bottom 0.305: U10.6 56.46,31.76 C51.2 C50.2
N$35
  Bottom 0.305: C51.1 57.03,34.39 R31.2
N$36
  Bottom 0.305: U10.5 55.01,29.9 R35.2 R34.1
N$37
  Bottom 0.305: U10.7 57.73,31.05 58.05,31.38 R36.1
N$38
  Bottom 0.305: C58.1 59.07,29.79 U10.8
N$101  (via drill 0.3, 0.33)
  Top 0.254: v65.39,7.17 49.97,7.17 v49.41,6.61
  Bottom 0.254: C57.1 55.27,20.47 55.38,20.58 | R36.2 58.07,33.23 58.07,33.69 58.48,34.09 59.65,34.09 61.17,32.57 61.17,25.41 60.01,24.24 60.01,19.92 59.65,19.56 55.97,19.56 C55.1 | U4.2 54.39,7.63 49.34,7.63 49.34,6.61 49.44,6.61 | R5.2 64.73,7.83 v65.39,7.17
  Bottom 0.305: C40.1 50.95,7.5 | v49.41,6.61 49.41,7.13 49.79,7.51
  Bottom 0.61: C40.1 51.12,7.7 52.33,7.7 | 52.33,7.7 U4.2 | C41.1 52.33,6.9 52.33,7.7 | 57.67,22.36 57.73,22.42 U10.2
  Bottom 0.762: L3.2 48.8,17.02 55.38,17.02 55.38,18.94 | C55.1 55.38,18.94 | 55.38,18.94 55.38,20.58 55.38,20.83 57.67,20.83 57.67,22.36
  Bottom 1.016: L3.2 48.8,7.51 49.79,7.51 C40.1
P0_RX_N
  Top 0.254: U1.8 39.17,36.19 39.81,36.84 39.81,37.64 38.79,38.67 33.58,38.67 24.97,47.28 23.71,47.28 | 23.71,47.28 16.16,47.28 14.51,48.93 11.88,48.93 9.97,47.01 9.97,41.87 11.07,40.76 X3.6 | R43.2 23.61,47.17 23.71,47.28
P0_RX_P
  Top 0.254: U1.9 40.86,36.19 40.22,36.84 40.22,37.81 38.96,39.07 33.75,39.07 25.14,47.68 23.53,47.68 | 23.53,47.68 16.33,47.68 14.67,49.33 11.71,49.33 9.56,47.18 9.56,41 11.19,39.38 12.05,39.38 12.76,40.09 12.76,43.32 X3.3 | R42.2 23.61,47.76 23.53,47.68
P0_TX_N
  Top 0.254: U1.5 31.55,36.19 32.22,36.86 32.22,38.45 28.09,42.58 23.53,42.58 23.45,42.58 | 23.45,42.58 19.2,42.58 15.94,45.84 X3.2 | R41.2 23.45,42.58
P0_TX_P
  Top 0.254: 23.45,42.98 28.26,42.98 32.62,38.62 32.62,36.86 33.29,36.19 U1.6 33.67,36.05 33.71,36.05 33.79,35.97 | 23.45,42.98 19.37,42.98 15.22,47.13 X3.1 | R40.2 23.45,42.98 | 33.84,35.92 33.79,35.97 | 33.79,35.97 33.74,35.92 33.79,35.92 33.78,35.94
P1_P2_PWR  (via drill 0.38, 0.61)
  Top 0.305: v9.03,22.99 9.03,23.37 8.77,23.63 | v10.81,14.87 10.37,14.87 J5.1 | v9.79,30.11 9.66,29.98 9.54,29.98 9.11,29.55 F1.1
  Top 1.27: F1.1 9.11,25.53 C39.2 C38.2 9.96,23.63 8.77,23.63 5.73,23.63 5.73,20.2 5.65,20.2 J5.5 J5.1
  Bottom 0.254: U9.4 13.96,13.9 13.94,13.89
  Bottom 0.305: v9.03,22.99 10.17,21.85 11.31,21.85 13.51,19.66 U8.4 | 13.94,13.89 13.22,14.61 11.06,14.61 v10.81,14.87 | R22.2 16.19,30.11 v9.79,30.11
POE_VIN
  Bottom 1.27: D2.A 32.12,34.68 13.73,34.68 POE_EN.1
RX
  Top 0.254: R18.2 56.93,46.16 57.92,47.15 61.12,47.15 63.13,49.16 63.13,50.68 J2.2
SCK  (via drill 0.3)
  Top 0.254: v64.32,37.95 63.12,39.16 U7.8
  Bottom 0.254: ICSP.3 67.22,29.24 67.22,32.62 65.54,34.3 65.54,36.73 v64.32,37.95
SD_CLK
  Bottom 0.254: U3.34 30.89,18.32 R20.1
SD_CMD
  Bottom 0.254: U3.36 36.76,17.32 38.62,19.18 41.67,19.18 42.17,19.69 43.33,19.69 U$14.3
SD_DAT0
  Bottom 0.254: U3.30 32.26,20.32 32.65,20.71 33.67,20.71 36.84,23.88 43.12,23.88 U$14.7
SD_DAT1
  Bottom 0.254: U3.29 32,20.82 32.4,21.22 33.28,21.22 37.28,25.21 U$14.8
SD_DAT2
  Bottom 0.254: U$14.1 38.47,17.51 35.19,14.23 26.55,14.23 25.79,14.99 25.79,15.79 U3.39
SD_DAT3
  Bottom 0.254: U3.38 26.26,16.61 26.55,16.9 27.32,16.9 27.44,16.77 36.97,16.77 38.8,18.61 U$14.2
TX
  Top 0.254: U6.6 50.68,46.56 51.93,47.81
  Top 0.305: 51.93,47.81 57.59,47.81 59.45,49.66 59.45,51.95 59.95,52.46 65.03,52.46 65.8,51.7 J2.1
UART_RX
  Top 0.254: U1.33 41.29,32.39 41.92,33.03 47.41,33.03 48.07,33.69 48.07,38.21 50.71,40.85 50.71,41.68 U6.3
UART_TX
  Top 0.254: U1.34 38.75,11.87 40.75,13.87 40.75,32.62 41.67,33.53 47.25,33.53 47.56,33.84 47.56,38.31 50.2,40.95 50.2,41.69 U6.2
  Top 0.406: 38.75,10.67 U1.34
USB3_D_N
  Bottom 0.191: U3.2 18.32,17.82 18.3,17.84 17.87,17.84 16.84,16.82 16.84,14.78 13.48,11.42 | 13.48,11.42 13.05,10.99 5.03,10.99 4.2,11.82 4.2,13.72 4.84,14.36 5.53,14.36 J5.6 | U9.2 13.98,10.93 13.48,11.42
USB3_D_P
  Bottom 0.191: U3.3 18.38,18.32 18.3,18.24 17.71,18.24 16.45,16.98 16.45,14.95 13.59,12.08 | 13.59,12.08 12.88,11.38 6.73,11.38 J5.7 | U9.3 13.18,12.49 13.59,12.08
USB4_D_N
  Bottom 0.191: U3.4 19.1,18.82 19.06,18.86 16.35,18.86 15.08,17.59 11.57,17.59 | 11.57,17.59 10.51,17.59 10.11,17.2 10.11,16.31 9.24,15.43 8.9,15.43 8.27,14.8 J5.2 | U8.2 11.58,17.58 11.57,17.59
USB4_D_P
  Bottom 0.191: U3.5 19.13,19.32 19.06,19.25 16.18,19.25 14.91,17.98 11.57,17.98 | 11.57,17.98 10.34,17.98 9.72,17.36 9.72,16.47 9.07,15.82 7.45,15.82 6.87,15.25 6.87,13.87 J5.3 | U8.3 11.58,17.99 11.57,17.98
USB_N  (via drill 0.33)
  Top 0.191: 18.57,33.55 19.21,33.55 20.08,32.69 21.29,32.69 23.17,30.81 23.17,26.93 v23.63,26.93
  Top 0.254: U1.50 18.57,33.66 18.57,33.55
  Bottom 0.191: v23.63,26.93 23.25,26.93 23.26,26.92 U3.17
USB_P  (via drill 0.33)
  Top 0.191: 18.57,31.01 18.74,31.01 20.08,32.35 21.15,32.35 22.83,30.67 22.83,26.93 v22.36,26.93
  Top 0.254: 18.57,31.01 18.44,31.01 U1.49
  Bottom 0.191: v22.36,26.93 22.74,26.93 22.76,26.91 U3.16
VCC1.8  (via drill 0.33, 0.38, 0.41)  (1 unrouted)
  Top 0.254: v25.79,27.06 27.32,25.53 v27.44,25.53
  VCC 0.406: v13.98,21.34 15.5,22.87 v21.22,22.87
  Bottom 0.254: U3.19 24.26,25.15 25.79,26.68 v25.79,27.06 | U3.23 26.26,25.37 26.93,26.04 C31.1 27.62,25.71 v27.44,25.53 | U3.12 19.37,23.22 19.37,25.66 18.6,26.42 18.17,26.42
  Bottom 0.305: 18.17,26.42 C33.1 | C32.1 27.32,28.2 26.81,27.69 26.43,27.69 v25.79,27.06
  Bottom 0.406: R33.1 v13.98,21.34 | v21.22,22.87 20.27,22.87
  pour GND: 20.71,24.52 25.03,24.52 25.03,27.57 26.68,27.57 26.68,26.42 27.95,26.42 27.95,24.52 27.44,24.52 27.44,23.37 21.98,23.37 21.98,22.36 20.71,22.36
VCC3.3
  Bottom 0.254: C27.1 26.93,27.06 25.79,25.91 25.79,24.35 U3.22 | U3.1 19.76,16 C30.1
  Bottom 0.305: C26.1 26.05,11.56 24.9,12.71 24.78,12.71 23.26,14.22 U3.44 23.26,17.39 23.25,17.41 | C25.1 C24.1 28.08,11.94 26.93,13.09 26.17,13.09 25.54,13.72 25.28,13.72 24.27,14.74 U3.42 24.26,17.4 24.27,17.41 | C28.1 20.97,26.68 22.26,25.38 U3.15 22.26,23.35 22.49,23.12 22.49,22.36 21.98,21.85 21.47,21.85 | C29.1 16.77,20.33 17.28,19.82 U3.6 21.34,19.82 | C23.1 17.28,23.58 17.28,22.99 18.45,21.82 U3.10 20.94,21.82 20.97,21.85 | 25.79,21.34 25.76,21.37 U3.22 | U3.1 21.01,17.32 21.09,17.41
  Bottom 0.406: C23.1 16.7,24.62 R27.1 | 22.74,21.34 22.74,21.85 21.47,21.85 20.97,21.85 | 21.34,19.82 22.49,19.82 22.74,20.07
  Bottom 0.813: 25.79,21.34 25.79,18.55 24.65,17.41 24.27,17.41 23.25,17.41 22.74,17.41 | 22.74,17.41 22.74,20.07 22.74,21.34 22.74,21.72 | 21.09,17.41 22.74,17.41
VIN  (via drill 0.56)  (1 unrouted)
  Top 1.27: v42.56,31.86 42.56,15.75 v42.58,15.75
  Bottom 1.27: J3.8 48.02,4.83 47,5.85 45.22,5.85 44.9,6.17 L3.1 42.58,9.03 v42.58,15.75 | 42.56,31.91 42.56,34.45 D2.C
XSCI
  Bottom 0.254: X1.1 21.68,10.92 C18.1 21.6,12.02 21.6,12.71 22.26,13.37 U3.46
XSCO
  Bottom 0.254: X1.3 23.16,8.61 22.36,9.4 22.36,11.39 C21.1 22.76,12.1 U3.45

## Text on the board
tPlace: 13 | 12 | 11 | 10 | 9 | 8 | 7 | 6 | 5 | 4 | 3 | 2 | 1 | 0
tNames: DIGITAL | GND | AREF | RX | TX | YUN SHIELD V2.4 | 1 | A3 | A4 | A5 | IOREF | RST | 3V3 | 5V | GND | GND | VIN | A0 | A1 | A2
214bmp: D:/SmartProjects/Snc/a4_bn_logo2.bmp